# Altium PCB nrf24l01_cell(P40).PcbDoc (part 2 of 11)
Units mm, origin at the board's own origin, x right, y up, seen from the top; angles counter-clockwise.
Board outline 136.2 x 112.2 mm, 2 copper layers (TopLayer, BottomLayer); 520 components, 0 nets, 2804 pads, 1040 vias.
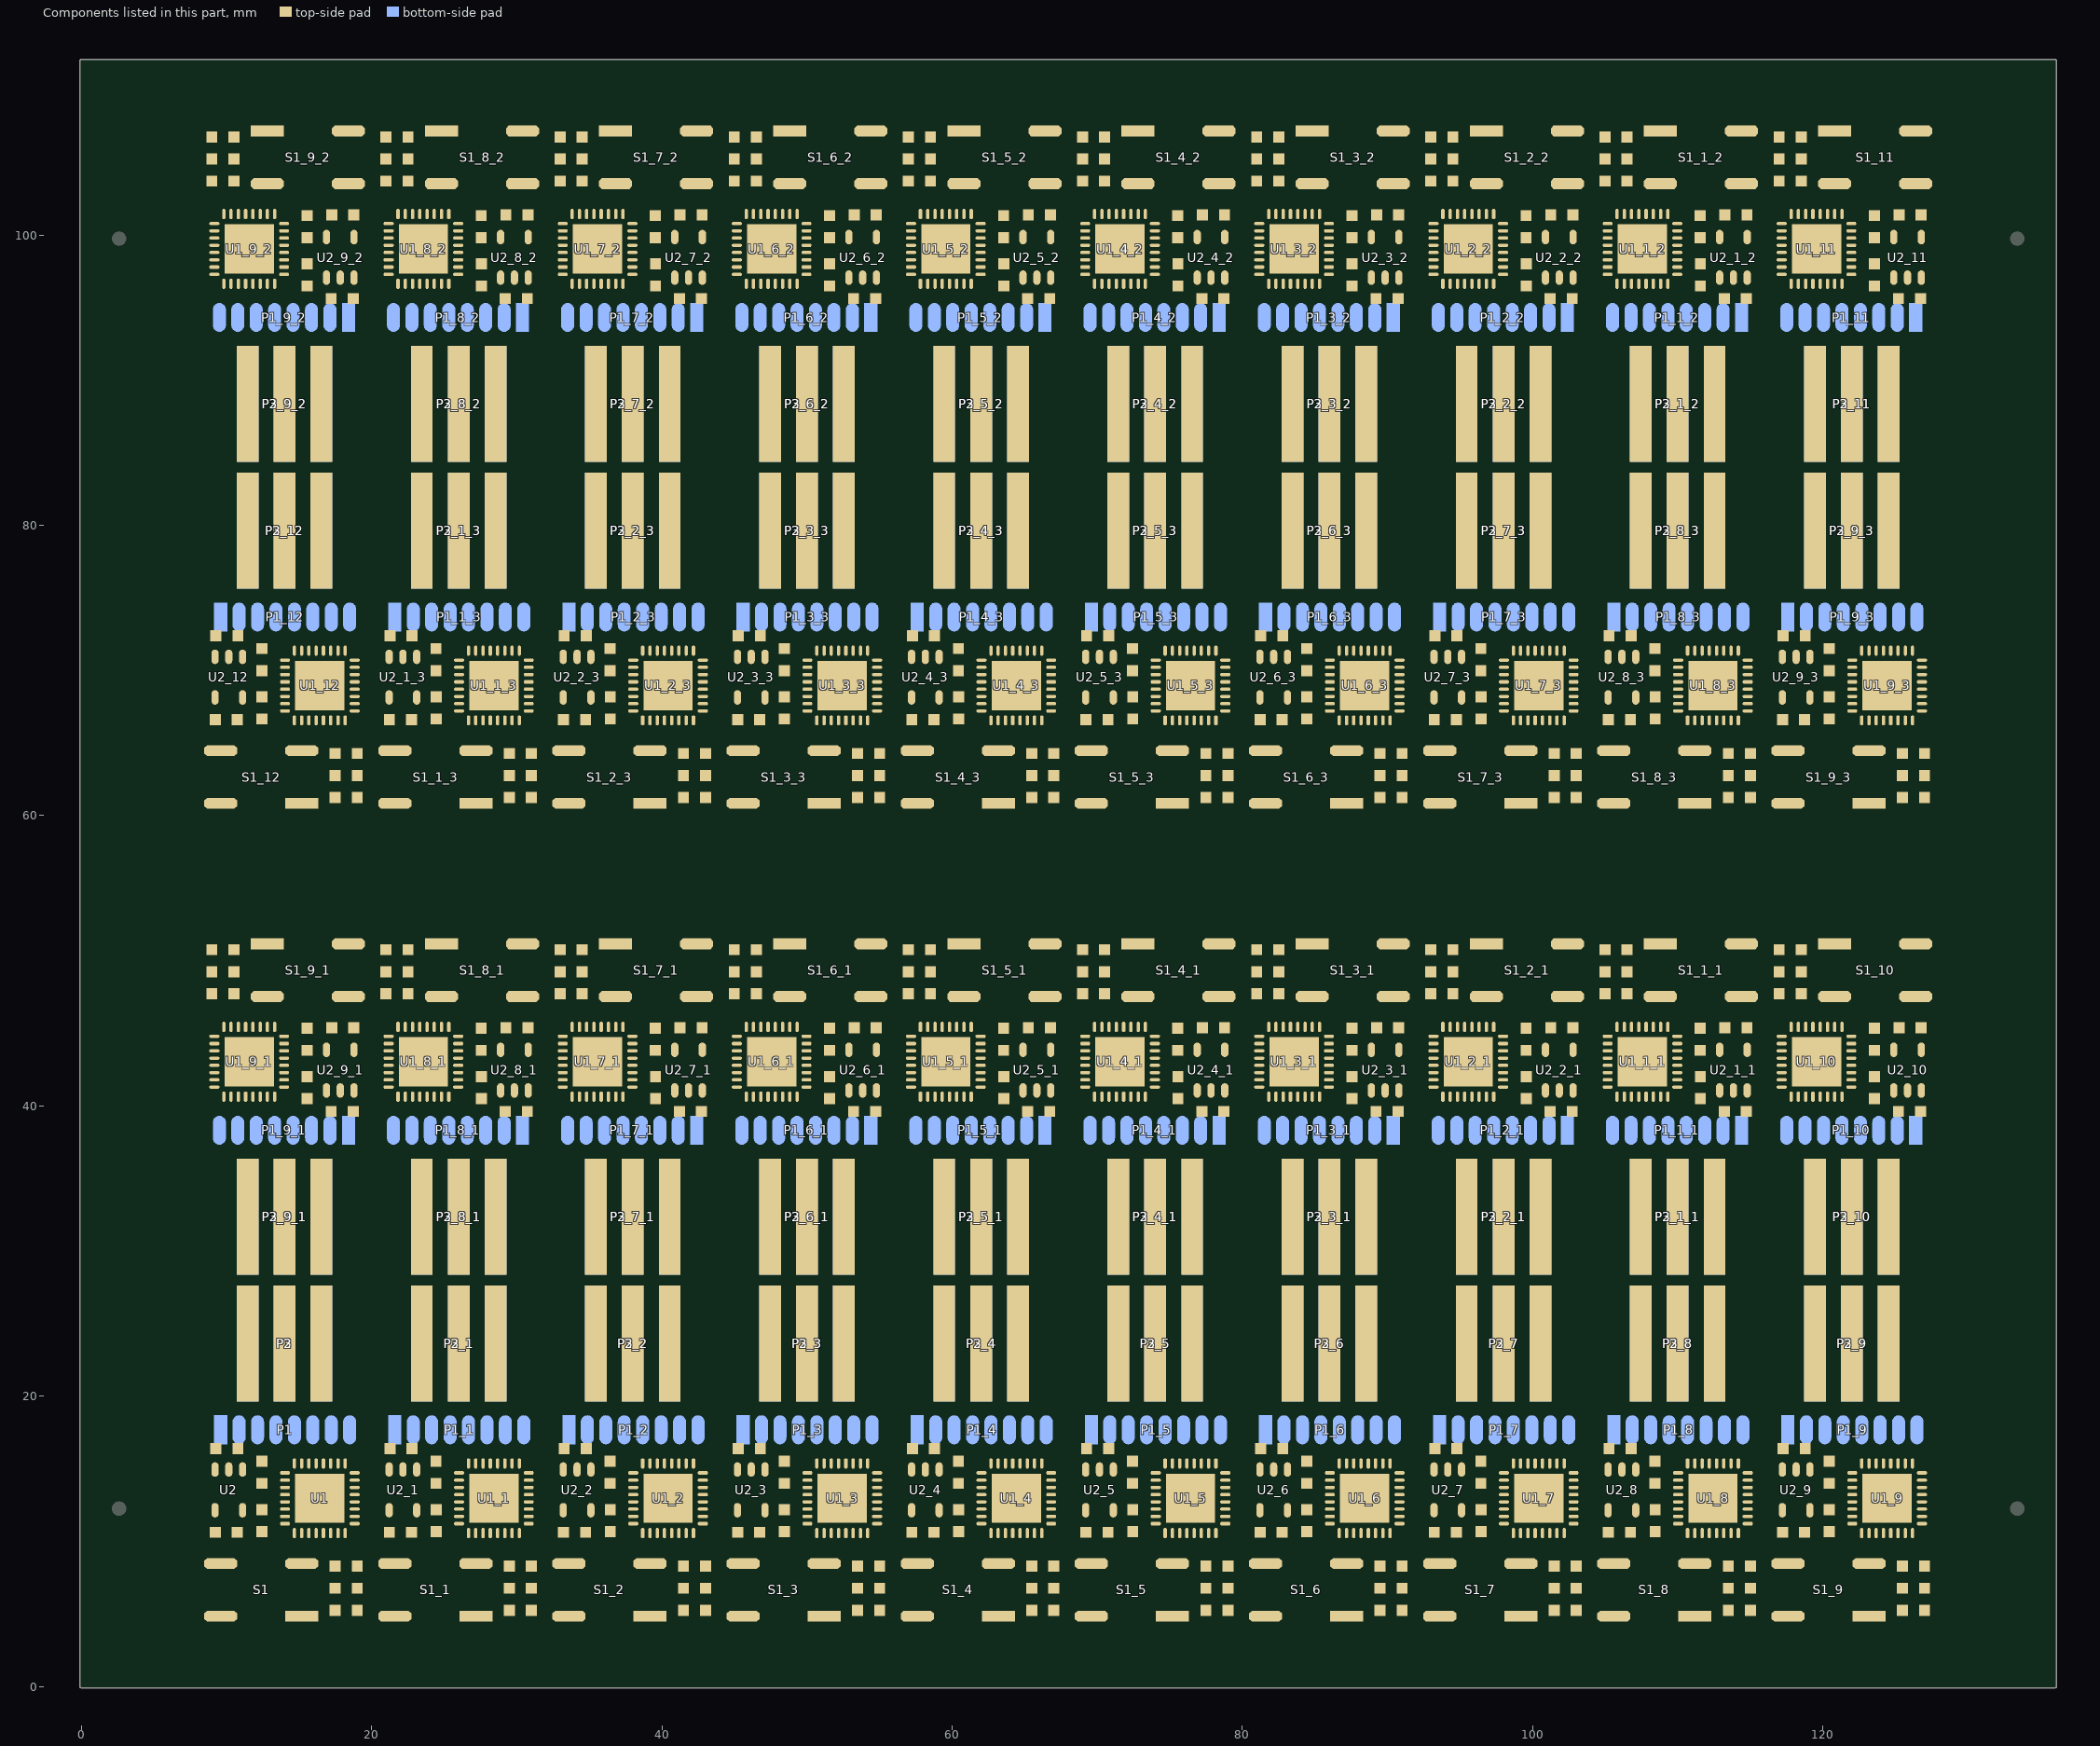
[diagram p2: the components of this part, seen from the top]

## Via types
v1: diameter 0.4, hole 0.2, TopLayer to BottomLayer, tented both sides, 1040 vias

## Nets (pads, with @x,y where several pads share a name; then routed paths per layer and width w, separated by ;. In a path a pad name is that pad's centre, name@x,y a point inside that pad or via, vN(x,y) a via of type N, cw(c..) or ccw(c..) an arc to the next point about the centre after c; other vN are vias at no path point)
pads on no net: C1.1 C1.2 C1_1.1 C1_1.2 C1_1_1.1 C1_1_1.2 C1_1_2.1 C1_1_2.2 C1_1_3.1 C1_1_3.2 C1_2.1 C1_2.2 C1_2_1.1 C1_2_1.2 C1_2_2.1 C1_2_2.2 C1_2_3.1 C1_2_3.2 C1_3.1 C1_3.2 C1_3_1.1 C1_3_1.2 C1_3_2.1 C1_3_2.2 C1_3_3.1 C1_3_3.2 C1_4.1 C1_4.2 C1_4_1.1 C1_4_1.2 C1_4_2.1 C1_4_2.2 C1_4_3.1 C1_4_3.2 C1_5.1 C1_5.2 C1_5_1.1 C1_5_1.2 C1_5_2.1 C1_5_2.2 C1_5_3.1 C1_5_3.2 C1_6.1 C1_6.2 C1_6_1.1 C1_6_1.2 C1_6_2.1 C1_6_2.2 C1_6_3.1 C1_6_3.2 C1_7.1 C1_7.2 C1_7_1.1 C1_7_1.2 C1_7_2.1 C1_7_2.2 C1_7_3.1 C1_7_3.2 C1_8.1 C1_8.2 C1_8_1.1 C1_8_1.2 C1_8_2.1 C1_8_2.2 C1_8_3.1 C1_8_3.2 C1_9.1 C1_9.2 C1_9_1.1 C1_9_1.2 C1_9_2.1 C1_9_2.2 C1_9_3.1 C1_9_3.2 C1_10.1 C1_10.2 C1_11.1 C1_11.2 C1_12.1 C1_12.2 C2.1 C2.2 C2_1.1 C2_1.2 C2_1_1.1 C2_1_1.2 C2_1_2.1 C2_1_2.2 C2_1_3.1 C2_1_3.2 C2_2.1 C2_2.2 C2_2_1.1 C2_2_1.2 C2_2_2.1 C2_2_2.2 C2_2_3.1 C2_2_3.2 C2_3.1 C2_3.2 C2_3_1.1 C2_3_1.2 C2_3_2.1 C2_3_2.2 C2_3_3.1 C2_3_3.2 C2_4.1 C2_4.2 C2_4_1.1 C2_4_1.2 C2_4_2.1 C2_4_2.2 C2_4_3.1 C2_4_3.2 C2_5.1 C2_5.2 C2_5_1.1 C2_5_1.2 C2_5_2.1 C2_5_2.2 C2_5_3.1 C2_5_3.2 C2_6.1 C2_6.2 C2_6_1.1 C2_6_1.2 C2_6_2.1 C2_6_2.2 C2_6_3.1 C2_6_3.2 C2_7.1 C2_7.2 C2_7_1.1 C2_7_1.2 C2_7_2.1 C2_7_2.2 C2_7_3.1 C2_7_3.2 C2_8.1 C2_8.2 C2_8_1.1 C2_8_1.2 C2_8_2.1 C2_8_2.2 C2_8_3.1 C2_8_3.2 C2_9.1 C2_9.2 C2_9_1.1 C2_9_1.2 C2_9_2.1 C2_9_2.2 C2_9_3.1 C2_9_3.2 C2_10.1 C2_10.2 C2_11.1 C2_11.2 C2_12.1 C2_12.2 C3.1 C3.2 C3_1.1 C3_1.2 C3_1_1.1 C3_1_1.2 C3_1_2.1 C3_1_2.2 C3_1_3.1 C3_1_3.2 C3_2.1 C3_2.2 C3_2_1.1 C3_2_1.2 C3_2_2.1 C3_2_2.2 C3_2_3.1 C3_2_3.2 C3_3.1 C3_3.2 C3_3_1.1 C3_3_1.2 C3_3_2.1 C3_3_2.2 C3_3_3.1 C3_3_3.2 C3_4.1 C3_4.2 C3_4_1.1 C3_4_1.2 C3_4_2.1 C3_4_2.2 C3_4_3.1 C3_4_3.2 C3_5.1 C3_5.2 C3_5_1.1 C3_5_1.2 C3_5_2.1 C3_5_2.2 C3_5_3.1 C3_5_3.2 C3_6.1 C3_6.2 C3_6_1.1 C3_6_1.2 C3_6_2.1 C3_6_2.2 C3_6_3.1 C3_6_3.2 C3_7.1 C3_7.2 C3_7_1.1 C3_7_1.2 C3_7_2.1 C3_7_2.2 C3_7_3.1 C3_7_3.2 C3_8.1 C3_8.2 C3_8_1.1 C3_8_1.2 C3_8_2.1 C3_8_2.2 C3_8_3.1 C3_8_3.2 C3_9.1 C3_9.2 C3_9_1.1 C3_9_1.2 C3_9_2.1 C3_9_2.2 C3_9_3.1 C3_9_3.2 C3_10.1 C3_10.2 C3_11.1 C3_11.2 C3_12.1 C3_12.2 D1.A D1.K D1_1.A D1_1.K D1_1_1.A D1_1_1.K D1_1_2.A D1_1_2.K D1_1_3.A D1_1_3.K D1_2.A D1_2.K D1_2_1.A D1_2_1.K D1_2_2.A D1_2_2.K D1_2_3.A D1_2_3.K D1_3.A D1_3.K D1_3_1.A D1_3_1.K D1_3_2.A D1_3_2.K D1_3_3.A D1_3_3.K D1_4.A D1_4.K D1_4_1.A D1_4_1.K D1_4_2.A D1_4_2.K D1_4_3.A D1_4_3.K D1_5.A D1_5.K D1_5_1.A D1_5_1.K D1_5_2.A D1_5_2.K D1_5_3.A D1_5_3.K D1_6.A D1_6.K D1_6_1.A D1_6_1.K D1_6_2.A D1_6_2.K D1_6_3.A D1_6_3.K D1_7.A D1_7.K D1_7_1.A D1_7_1.K D1_7_2.A D1_7_2.K D1_7_3.A D1_7_3.K D1_8.A D1_8.K D1_8_1.A D1_8_1.K D1_8_2.A D1_8_2.K D1_8_3.A D1_8_3.K D1_9.A D1_9.K D1_9_1.A D1_9_1.K D1_9_2.A D1_9_2.K D1_9_3.A D1_9_3.K D1_10.A D1_10.K D1_11.A D1_11.K D1_12.A D1_12.K P1.1 P1.2 P1.3 P1.4 P1.5 P1.6 P1.7 P1.8 P1_1.1 P1_1.2 P1_1.3 P1_1.4 P1_1.5 P1_1.6 P1_1.7 P1_1.8 P1_1_1.1 P1_1_1.2 P1_1_1.3 P1_1_1.4 P1_1_1.5 P1_1_1.6 P1_1_1.7 P1_1_1.8 P1_1_2.1 P1_1_2.2 P1_1_2.3 P1_1_2.4 P1_1_2.5 P1_1_2.6 P1_1_2.7 P1_1_2.8 P1_1_3.1 P1_1_3.2 P1_1_3.3 P1_1_3.4 P1_1_3.5 P1_1_3.6 P1_1_3.7 P1_1_3.8 P1_2.1 P1_2.2 P1_2.3 P1_2.4 P1_2.5 P1_2.6 P1_2.7 P1_2.8 P1_2_1.1 P1_2_1.2 P1_2_1.3 P1_2_1.4 P1_2_1.5 P1_2_1.6 P1_2_1.7 P1_2_1.8 P1_2_2.1 P1_2_2.2 P1_2_2.3 P1_2_2.4 P1_2_2.5 P1_2_2.6 P1_2_2.7 P1_2_2.8 P1_2_3.1 P1_2_3.2 P1_2_3.3 P1_2_3.4 P1_2_3.5 P1_2_3.6 P1_2_3.7 P1_2_3.8 P1_3.1 P1_3.2 P1_3.3 P1_3.4 P1_3.5 P1_3.6 P1_3.7 P1_3.8 P1_3_1.1 P1_3_1.2 P1_3_1.3 P1_3_1.4 P1_3_1.5 P1_3_1.6 P1_3_1.7 P1_3_1.8 P1_3_2.1 P1_3_2.2 P1_3_2.3 P1_3_2.4 P1_3_2.5 P1_3_2.6 P1_3_2.7 P1_3_2.8 P1_3_3.1 P1_3_3.2 P1_3_3.3 P1_3_3.4 P1_3_3.5 P1_3_3.6 P1_3_3.7 P1_3_3.8 P1_4.1 P1_4.2 P1_4.3 P1_4.4 P1_4.5 P1_4.6 P1_4.7 P1_4.8 P1_4_1.1 P1_4_1.2 P1_4_1.3 P1_4_1.4 P1_4_1.5 P1_4_1.6 P1_4_1.7 P1_4_1.8 P1_4_2.1 P1_4_2.2 P1_4_2.3 P1_4_2.4 P1_4_2.5 P1_4_2.6 P1_4_2.7 P1_4_2.8 P1_4_3.1 P1_4_3.2 P1_4_3.3 P1_4_3.4 P1_4_3.5 P1_4_3.6 P1_4_3.7 P1_4_3.8 P1_5.1 P1_5.2 P1_5.3 P1_5.4 P1_5.5 P1_5.6 P1_5.7 P1_5.8 P1_5_1.1 P1_5_1.2 P1_5_1.3 P1_5_1.4 P1_5_1.5 P1_5_1.6 P1_5_1.7 P1_5_1.8 P1_5_2.1 P1_5_2.2 P1_5_2.3 P1_5_2.4 P1_5_2.5 P1_5_2.6 P1_5_2.7 P1_5_2.8 P1_5_3.1 P1_5_3.2 P1_5_3.3 P1_5_3.4 P1_5_3.5 P1_5_3.6 P1_5_3.7 P1_5_3.8 P1_6.1 P1_6.2 P1_6.3 P1_6.4 P1_6.5 P1_6.6 P1_6.7 P1_6.8 P1_6_1.1 P1_6_1.2 P1_6_1.3 P1_6_1.4 P1_6_1.5 P1_6_1.6 P1_6_1.7 P1_6_1.8 P1_6_2.1 P1_6_2.2 P1_6_2.3 P1_6_2.4 P1_6_2.5 P1_6_2.6 P1_6_2.7 P1_6_2.8 P1_6_3.1 P1_6_3.2 P1_6_3.3 P1_6_3.4 P1_6_3.5 P1_6_3.6 P1_6_3.7 P1_6_3.8 P1_7.1 P1_7.2 P1_7.3 P1_7.4 P1_7.5 P1_7.6 P1_7.7 P1_7.8 P1_7_1.1 P1_7_1.2 P1_7_1.3 P1_7_1.4 P1_7_1.5 P1_7_1.6 P1_7_1.7 P1_7_1.8 P1_7_2.1 P1_7_2.2 P1_7_2.3 P1_7_2.4 P1_7_2.5 P1_7_2.6 P1_7_2.7 P1_7_2.8 P1_7_3.1 P1_7_3.2 P1_7_3.3 P1_7_3.4 P1_7_3.5 P1_7_3.6 P1_7_3.7 P1_7_3.8 P1_8.1 P1_8.2 P1_8.3 P1_8.4 P1_8.5 P1_8.6 P1_8.7 P1_8.8 P1_8_1.1 P1_8_1.2 P1_8_1.3 P1_8_1.4 P1_8_1.5 P1_8_1.6 P1_8_1.7 P1_8_1.8 P1_8_2.1 P1_8_2.2 P1_8_2.3 P1_8_2.4 P1_8_2.5 P1_8_2.6 P1_8_2.7 P1_8_2.8 P1_8_3.1 P1_8_3.2 P1_8_3.3 P1_8_3.4 P1_8_3.5 P1_8_3.6 P1_8_3.7 P1_8_3.8 P1_9.1 P1_9.2 P1_9.3 P1_9.4 P1_9.5 P1_9.6 P1_9.7 P1_9.8 P1_9_1.1 P1_9_1.2 P1_9_1.3 P1_9_1.4 P1_9_1.5 P1_9_1.6 P1_9_1.7 P1_9_1.8 P1_9_2.1 P1_9_2.2 P1_9_2.3 P1_9_2.4 P1_9_2.5 P1_9_2.6 P1_9_2.7 P1_9_2.8 P1_9_3.1 P1_9_3.2 P1_9_3.3 P1_9_3.4 P1_9_3.5 P1_9_3.6 P1_9_3.7 P1_9_3.8 P1_10.1 P1_10.2 P1_10.3 P1_10.4 P1_10.5 P1_10.6 P1_10.7 P1_10.8 P1_11.1 P1_11.2 P1_11.3 P1_11.4 P1_11.5 P1_11.6 P1_11.7 P1_11.8 P1_12.1 P1_12.2 P1_12.3 P1_12.4 P1_12.5 P1_12.6 P1_12.7 P1_12.8 P2.1 P2.2 P2.3 P2_1.1 P2_1.2 P2_1.3 P2_1_1.1 P2_1_1.2 P2_1_1.3 P2_1_2.1 P2_1_2.2 P2_1_2.3 P2_1_3.1 P2_1_3.2 P2_1_3.3 P2_2.1 P2_2.2 P2_2.3 P2_2_1.1 P2_2_1.2 P2_2_1.3 P2_2_2.1 P2_2_2.2 P2_2_2.3 P2_2_3.1 P2_2_3.2 P2_2_3.3 P2_3.1 P2_3.2 P2_3.3 P2_3_1.1 P2_3_1.2 P2_3_1.3 P2_3_2.1 P2_3_2.2 P2_3_2.3 P2_3_3.1 P2_3_3.2 P2_3_3.3 P2_4.1 P2_4.2 P2_4.3 P2_4_1.1 P2_4_1.2 P2_4_1.3 P2_4_2.1 P2_4_2.2 P2_4_2.3 P2_4_3.1 P2_4_3.2 P2_4_3.3 P2_5.1 P2_5.2 P2_5.3 P2_5_1.1 P2_5_1.2 P2_5_1.3 P2_5_2.1 P2_5_2.2 P2_5_2.3 P2_5_3.1 P2_5_3.2 P2_5_3.3 P2_6.1 P2_6.2 P2_6.3 P2_6_1.1 P2_6_1.2 P2_6_1.3 P2_6_2.1 P2_6_2.2 P2_6_2.3 P2_6_3.1 P2_6_3.2 P2_6_3.3 P2_7.1 P2_7.2 P2_7.3 P2_7_1.1 P2_7_1.2 P2_7_1.3 P2_7_2.1 P2_7_2.2 P2_7_2.3 P2_7_3.1 P2_7_3.2 P2_7_3.3 P2_8.1 P2_8.2 P2_8.3 P2_8_1.1 P2_8_1.2 P2_8_1.3 P2_8_2.1 P2_8_2.2 P2_8_2.3 P2_8_3.1 P2_8_3.2 P2_8_3.3 P2_9.1 P2_9.2 P2_9.3 P2_9_1.1 P2_9_1.2 P2_9_1.3 P2_9_2.1 P2_9_2.2 P2_9_2.3 P2_9_3.1 P2_9_3.2 P2_9_3.3 P2_10.1 P2_10.2 P2_10.3 P2_11.1 P2_11.2 P2_11.3 P2_12.1 P2_12.2 P2_12.3 P3.1 P3.2 P3.3 P3_1.1 P3_1.2 P3_1.3 P3_1_1.1 P3_1_1.2 P3_1_1.3 P3_1_2.1 P3_1_2.2 P3_1_2.3 P3_1_3.1 P3_1_3.2 P3_1_3.3 P3_2.1 P3_2.2 P3_2.3 P3_2_1.1 P3_2_1.2 P3_2_1.3 P3_2_2.1 P3_2_2.2 P3_2_2.3 P3_2_3.1 P3_2_3.2 P3_2_3.3 P3_3.1 P3_3.2 P3_3.3 P3_3_1.1 P3_3_1.2 P3_3_1.3 P3_3_2.1 P3_3_2.2 P3_3_2.3 P3_3_3.1 P3_3_3.2 P3_3_3.3 P3_4.1 P3_4.2 P3_4.3 P3_4_1.1 P3_4_1.2 P3_4_1.3 P3_4_2.1 P3_4_2.2 P3_4_2.3 P3_4_3.1 P3_4_3.2 P3_4_3.3 P3_5.1 P3_5.2 P3_5.3 P3_5_1.1 P3_5_1.2 P3_5_1.3 P3_5_2.1 P3_5_2.2 P3_5_2.3 P3_5_3.1 P3_5_3.2 P3_5_3.3 P3_6.1 P3_6.2 P3_6.3 P3_6_1.1 P3_6_1.2 P3_6_1.3 P3_6_2.1 P3_6_2.2 P3_6_2.3 P3_6_3.1 P3_6_3.2 P3_6_3.3 P3_7.1 P3_7.2 P3_7.3 P3_7_1.1 P3_7_1.2 P3_7_1.3 P3_7_2.1 P3_7_2.2 P3_7_2.3 P3_7_3.1 P3_7_3.2 P3_7_3.3 P3_8.1 P3_8.2 P3_8.3 P3_8_1.1 P3_8_1.2 P3_8_1.3 P3_8_2.1 P3_8_2.2 P3_8_2.3 P3_8_3.1 P3_8_3.2 P3_8_3.3 P3_9.1 P3_9.2 P3_9.3 P3_9_1.1 P3_9_1.2 P3_9_1.3 P3_9_2.1 P3_9_2.2 P3_9_2.3 P3_9_3.1 P3_9_3.2 P3_9_3.3 P3_10.1 P3_10.2 P3_10.3 P3_11.1 P3_11.2 P3_11.3 P3_12.1 P3_12.2 P3_12.3 R1.1 R1.2 R1_1.1 R1_1.2 R1_1_1.1 R1_1_1.2 R1_1_2.1 R1_1_2.2 R1_1_3.1 R1_1_3.2 R1_2.1 R1_2.2 R1_2_1.1 R1_2_1.2 R1_2_2.1 R1_2_2.2 R1_2_3.1 R1_2_3.2 R1_3.1 R1_3.2 R1_3_1.1 R1_3_1.2 R1_3_2.1 R1_3_2.2 R1_3_3.1 R1_3_3.2 R1_4.1 R1_4.2 R1_4_1.1 R1_4_1.2 R1_4_2.1 R1_4_2.2 R1_4_3.1 R1_4_3.2 R1_5.1 R1_5.2 R1_5_1.1 R1_5_1.2 R1_5_2.1 R1_5_2.2 R1_5_3.1 R1_5_3.2 R1_6.1 R1_6.2 R1_6_1.1 R1_6_1.2 R1_6_2.1 R1_6_2.2 R1_6_3.1 R1_6_3.2 R1_7.1 R1_7.2 R1_7_1.1 R1_7_1.2 R1_7_2.1 R1_7_2.2 R1_7_3.1 R1_7_3.2 R1_8.1 R1_8.2 R1_8_1.1 R1_8_1.2 R1_8_2.1 R1_8_2.2 R1_8_3.1 R1_8_3.2 R1_9.1 R1_9.2 R1_9_1.1 R1_9_1.2 R1_9_2.1 R1_9_2.2 R1_9_3.1 R1_9_3.2 R1_10.1 R1_10.2 R1_11.1 R1_11.2 R1_12.1 R1_12.2 R2.1 R2.2 R2_1.1 R2_1.2 R2_1_1.1 R2_1_1.2 R2_1_2.1 R2_1_2.2 R2_1_3.1 R2_1_3.2 R2_2.1 R2_2.2 R2_2_1.1 R2_2_1.2 R2_2_2.1 R2_2_2.2 R2_2_3.1 R2_2_3.2 R2_3.1 R2_3.2 R2_3_1.1 R2_3_1.2 R2_3_2.1 R2_3_2.2 R2_3_3.1 R2_3_3.2 R2_4.1 R2_4.2 R2_4_1.1 R2_4_1.2 R2_4_2.1 R2_4_2.2 R2_4_3.1 R2_4_3.2 R2_5.1 R2_5.2 R2_5_1.1 R2_5_1.2 R2_5_2.1 R2_5_2.2 R2_5_3.1 R2_5_3.2 R2_6.1 R2_6.2 R2_6_1.1 R2_6_1.2 R2_6_2.1 R2_6_2.2 R2_6_3.1 R2_6_3.2 R2_7.1 R2_7.2 R2_7_1.1 R2_7_1.2 R2_7_2.1 R2_7_2.2 R2_7_3.1 R2_7_3.2 R2_8.1 R2_8.2 R2_8_1.1 R2_8_1.2 R2_8_2.1 R2_8_2.2 R2_8_3.1 R2_8_3.2 R2_9.1 R2_9.2 R2_9_1.1 R2_9_1.2 R2_9_2.1 R2_9_2.2 R2_9_3.1 R2_9_3.2 R2_10.1 R2_10.2 R2_11.1 R2_11.2 R2_12.1 R2_12.2 R3.1 R3.2 R3_1.1 R3_1.2 R3_1_1.1 R3_1_1.2 R3_1_2.1 R3_1_2.2 R3_1_3.1 R3_1_3.2 R3_2.1 R3_2.2 R3_2_1.1 R3_2_1.2 R3_2_2.1 R3_2_2.2 R3_2_3.1 R3_2_3.2 R3_3.1 R3_3.2 R3_3_1.1 R3_3_1.2 R3_3_2.1 R3_3_2.2 R3_3_3.1 R3_3_3.2 R3_4.1 R3_4.2 R3_4_1.1 R3_4_1.2 R3_4_2.1 R3_4_2.2 R3_4_3.1 R3_4_3.2 R3_5.1 R3_5.2 R3_5_1.1 R3_5_1.2 R3_5_2.1 R3_5_2.2 R3_5_3.1 R3_5_3.2 R3_6.1 R3_6.2 R3_6_1.1 R3_6_1.2 R3_6_2.1 R3_6_2.2 R3_6_3.1 R3_6_3.2 R3_7.1 R3_7.2 R3_7_1.1 R3_7_1.2 R3_7_2.1 R3_7_2.2 R3_7_3.1 R3_7_3.2 R3_8.1 R3_8.2 R3_8_1.1 R3_8_1.2 R3_8_2.1 R3_8_2.2 R3_8_3.1 R3_8_3.2 R3_9.1 R3_9.2 R3_9_1.1 R3_9_1.2 R3_9_2.1 R3_9_2.2 R3_9_3.1 R3_9_3.2 R3_10.1 R3_10.2 R3_11.1 R3_11.2 R3_12.1 R3_12.2 S1.1 S1.2 S1.3 S1.4 S1_1.1 S1_1.2 S1_1.3 S1_1.4 S1_1_1.1 S1_1_1.2 S1_1_1.3 S1_1_1.4 S1_1_2.1 S1_1_2.2 S1_1_2.3 S1_1_2.4 S1_1_3.1 S1_1_3.2 S1_1_3.3 S1_1_3.4 S1_2.1 S1_2.2 S1_2.3 S1_2.4 S1_2_1.1 S1_2_1.2 S1_2_1.3 S1_2_1.4 S1_2_2.1 S1_2_2.2 S1_2_2.3 S1_2_2.4 S1_2_3.1 S1_2_3.2 S1_2_3.3 S1_2_3.4 S1_3.1 S1_3.2 S1_3.3 S1_3.4 S1_3_1.1 S1_3_1.2 S1_3_1.3 S1_3_1.4 S1_3_2.1 S1_3_2.2 S1_3_2.3 S1_3_2.4 S1_3_3.1 S1_3_3.2 S1_3_3.3 S1_3_3.4 S1_4.1 S1_4.2 S1_4.3 S1_4.4 S1_4_1.1 S1_4_1.2 S1_4_1.3 S1_4_1.4 S1_4_2.1 S1_4_2.2 S1_4_2.3 S1_4_2.4 S1_4_3.1 S1_4_3.2 S1_4_3.3 S1_4_3.4 S1_5.1 S1_5.2 S1_5.3 S1_5.4 S1_5_1.1 S1_5_1.2 S1_5_1.3 S1_5_1.4 S1_5_2.1 S1_5_2.2 S1_5_2.3 S1_5_2.4 S1_5_3.1 S1_5_3.2 S1_5_3.3 S1_5_3.4 S1_6.1 S1_6.2 S1_6.3 S1_6.4 S1_6_1.1 S1_6_1.2 S1_6_1.3 S1_6_1.4 S1_6_2.1 S1_6_2.2 S1_6_2.3 S1_6_2.4 S1_6_3.1 S1_6_3.2 S1_6_3.3 S1_6_3.4 S1_7.1 S1_7.2 S1_7.3 S1_7.4 S1_7_1.1 S1_7_1.2 S1_7_1.3 S1_7_1.4 S1_7_2.1 S1_7_2.2 S1_7_2.3 S1_7_2.4 S1_7_3.1 S1_7_3.2 S1_7_3.3 S1_7_3.4 S1_8.1 S1_8.2 S1_8.3 S1_8.4 S1_8_1.1 S1_8_1.2 S1_8_1.3 S1_8_1.4 S1_8_2.1 S1_8_2.2 S1_8_2.3 S1_8_2.4 S1_8_3.1 S1_8_3.2 S1_8_3.3 S1_8_3.4 S1_9.1 S1_9.2 S1_9.3 S1_9.4 S1_9_1.1 S1_9_1.2 S1_9_1.3 S1_9_1.4 S1_9_2.1 S1_9_2.2 S1_9_2.3 S1_9_2.4 S1_9_3.1 S1_9_3.2 S1_9_3.3 S1_9_3.4 S1_10.1 S1_10.2 S1_10.3 S1_10.4 S1_11.1 S1_11.2 S1_11.3 S1_11.4 S1_12.1 S1_12.2 S1_12.3 S1_12.4 U1.1 U1.2 U1.3 U1.4 U1.5 U1.6 U1.7 U1.8 U1.9 U1.10 U1.11 U1.12 U1.13 U1.14 U1.15 U1.16 U1.17 U1.18 U1.19 U1.20 U1.21 U1.22 U1.23 U1.24 U1.25 U1.26 U1.27 U1.28 U1.29 U1.30 U1.31 U1.32 U1.33 U1_1.1 U1_1.2 U1_1.3 U1_1.4 U1_1.5 U1_1.6 U1_1.7 U1_1.8 U1_1.9 U1_1.10 U1_1.11 U1_1.12 U1_1.13 U1_1.14 U1_1.15 U1_1.16 U1_1.17 U1_1.18 U1_1.19 U1_1.20 U1_1.21 U1_1.22 U1_1.23 U1_1.24 U1_1.25 U1_1.26 U1_1.27 U1_1.28 U1_1.29 U1_1.30 U1_1.31 U1_1.32 U1_1.33 U1_1_1.1 U1_1_1.2 U1_1_1.3 U1_1_1.4 U1_1_1.5 U1_1_1.6 U1_1_1.7 U1_1_1.8 U1_1_1.9 U1_1_1.10 U1_1_1.11 U1_1_1.12 U1_1_1.13 U1_1_1.14 U1_1_1.15 U1_1_1.16 U1_1_1.17 U1_1_1.18 U1_1_1.19 U1_1_1.20 U1_1_1.21 U1_1_1.22 U1_1_1.23 U1_1_1.24 U1_1_1.25 U1_1_1.26 U1_1_1.27 U1_1_1.28 U1_1_1.29 U1_1_1.30 U1_1_1.31 U1_1_1.32 U1_1_1.33 U1_1_2.1 U1_1_2.2 U1_1_2.3 U1_1_2.4 U1_1_2.5 U1_1_2.6 U1_1_2.7 U1_1_2.8 U1_1_2.9 U1_1_2.10 U1_1_2.11 U1_1_2.12 U1_1_2.13 U1_1_2.14 U1_1_2.15 U1_1_2.16 U1_1_2.17 U1_1_2.18 U1_1_2.19 U1_1_2.20 U1_1_2.21 U1_1_2.22 U1_1_2.23 U1_1_2.24 U1_1_2.25 U1_1_2.26 U1_1_2.27 U1_1_2.28 U1_1_2.29 U1_1_2.30 U1_1_2.31 U1_1_2.32 U1_1_2.33 U1_1_3.1 U1_1_3.2 U1_1_3.3 U1_1_3.4 U1_1_3.5 U1_1_3.6 U1_1_3.7 U1_1_3.8 U1_1_3.9 U1_1_3.10 U1_1_3.11 U1_1_3.12 U1_1_3.13 U1_1_3.14 U1_1_3.15 U1_1_3.16 U1_1_3.17 U1_1_3.18 U1_1_3.19 U1_1_3.20 U1_1_3.21 U1_1_3.22 U1_1_3.23 U1_1_3.24 U1_1_3.25 U1_1_3.26 U1_1_3.27 U1_1_3.28 U1_1_3.29 U1_1_3.30 U1_1_3.31 U1_1_3.32 U1_1_3.33 U1_2.1 U1_2.2 U1_2.3 U1_2.4 U1_2.5 U1_2.6 U1_2.7 U1_2.8 U1_2.9 U1_2.10 U1_2.11 U1_2.12 U1_2.13 U1_2.14 U1_2.15 U1_2.16 U1_2.17 U1_2.18 U1_2.19 U1_2.20 U1_2.21 U1_2.22 U1_2.23 U1_2.24 U1_2.25 U1_2.26 U1_2.27 U1_2.28 U1_2.29 U1_2.30 U1_2.31 U1_2.32 U1_2.33 U1_2_1.1 U1_2_1.2 U1_2_1.3 U1_2_1.4 U1_2_1.5 U1_2_1.6 U1_2_1.7 U1_2_1.8 U1_2_1.9 U1_2_1.10 U1_2_1.11 U1_2_1.12 U1_2_1.13 U1_2_1.14 U1_2_1.15 U1_2_1.16 U1_2_1.17 U1_2_1.18 U1_2_1.19 U1_2_1.20 U1_2_1.21 U1_2_1.22 U1_2_1.23 U1_2_1.24 U1_2_1.25 U1_2_1.26 U1_2_1.27 U1_2_1.28 U1_2_1.29 U1_2_1.30 U1_2_1.31 U1_2_1.32 U1_2_1.33 U1_2_2.1 U1_2_2.2 U1_2_2.3 U1_2_2.4 U1_2_2.5 U1_2_2.6 U1_2_2.7 U1_2_2.8 U1_2_2.9 U1_2_2.10 U1_2_2.11 U1_2_2.12 U1_2_2.13 U1_2_2.14 U1_2_2.15 U1_2_2.16 U1_2_2.17 U1_2_2.18 U1_2_2.19 U1_2_2.20 U1_2_2.21 U1_2_2.22 U1_2_2.23 U1_2_2.24 U1_2_2.25 U1_2_2.26 U1_2_2.27 U1_2_2.28 U1_2_2.29 U1_2_2.30 U1_2_2.31 U1_2_2.32 U1_2_2.33 U1_2_3.1 U1_2_3.2 U1_2_3.3 U1_2_3.4 U1_2_3.5 U1_2_3.6 U1_2_3.7 U1_2_3.8 U1_2_3.9 U1_2_3.10 U1_2_3.11 U1_2_3.12 U1_2_3.13 U1_2_3.14 U1_2_3.15 U1_2_3.16 U1_2_3.17 U1_2_3.18 U1_2_3.19 U1_2_3.20 U1_2_3.21 U1_2_3.22 U1_2_3.23 U1_2_3.24 U1_2_3.25 U1_2_3.26 U1_2_3.27 U1_2_3.28 U1_2_3.29 U1_2_3.30 U1_2_3.31 U1_2_3.32 U1_2_3.33 U1_3.1 U1_3.2 U1_3.3 U1_3.4 U1_3.5 U1_3.6 U1_3.7 U1_3.8 U1_3.9 U1_3.10 U1_3.11 U1_3.12 U1_3.13 U1_3.14 U1_3.15 U1_3.16 U1_3.17 U1_3.18 U1_3.19 U1_3.20 U1_3.21 U1_3.22 U1_3.23 U1_3.24 U1_3.25 U1_3.26 U1_3.27 U1_3.28 U1_3.29 U1_3.30 U1_3.31 U1_3.32 U1_3.33 U1_3_1.1 U1_3_1.2 U1_3_1.3 U1_3_1.4 U1_3_1.5 U1_3_1.6 U1_3_1.7 U1_3_1.8 U1_3_1.9 U1_3_1.10 U1_3_1.11 U1_3_1.12 U1_3_1.13 U1_3_1.14 U1_3_1.15 U1_3_1.16 U1_3_1.17 U1_3_1.18 U1_3_1.19 U1_3_1.20 U1_3_1.21 U1_3_1.22 U1_3_1.23 U1_3_1.24 U1_3_1.25 U1_3_1.26 U1_3_1.27 U1_3_1.28 U1_3_1.29 U1_3_1.30 U1_3_1.31 U1_3_1.32 U1_3_1.33 U1_3_2.1 U1_3_2.2 U1_3_2.3 U1_3_2.4 U1_3_2.5 U1_3_2.6 U1_3_2.7 U1_3_2.8 U1_3_2.9 U1_3_2.10 U1_3_2.11 U1_3_2.12 U1_3_2.13 U1_3_2.14 U1_3_2.15 U1_3_2.16 U1_3_2.17 U1_3_2.18 U1_3_2.19 U1_3_2.20 U1_3_2.21 U1_3_2.22 U1_3_2.23 U1_3_2.24 U1_3_2.25 U1_3_2.26 U1_3_2.27 U1_3_2.28 U1_3_2.29 U1_3_2.30 U1_3_2.31 U1_3_2.32 U1_3_2.33 U1_3_3.1 U1_3_3.2 U1_3_3.3 U1_3_3.4 U1_3_3.5 U1_3_3.6 U1_3_3.7 U1_3_3.8 U1_3_3.9 U1_3_3.10 U1_3_3.11 U1_3_3.12 U1_3_3.13 U1_3_3.14 U1_3_3.15 U1_3_3.16 U1_3_3.17 U1_3_3.18 U1_3_3.19 U1_3_3.20 U1_3_3.21 U1_3_3.22 U1_3_3.23 U1_3_3.24 U1_3_3.25 U1_3_3.26 U1_3_3.27 U1_3_3.28 U1_3_3.29 U1_3_3.30 U1_3_3.31 U1_3_3.32 U1_3_3.33 U1_4.1 U1_4.2 U1_4.3 U1_4.4 U1_4.5 U1_4.6 U1_4.7 U1_4.8 U1_4.9 U1_4.10 U1_4.11 U1_4.12 U1_4.13 U1_4.14 U1_4.15 U1_4.16 U1_4.17 U1_4.18 U1_4.19 U1_4.20 U1_4.21 U1_4.22 U1_4.23 U1_4.24 U1_4.25 U1_4.26 U1_4.27 U1_4.28 U1_4.29 U1_4.30 U1_4.31 U1_4.32 U1_4.33 U1_4_1.1 U1_4_1.2 U1_4_1.3 U1_4_1.4 U1_4_1.5 U1_4_1.6 U1_4_1.7 U1_4_1.8 U1_4_1.9 U1_4_1.10 U1_4_1.11 U1_4_1.12 U1_4_1.13 U1_4_1.14 U1_4_1.15 U1_4_1.16 U1_4_1.17 U1_4_1.18 U1_4_1.19 U1_4_1.20 U1_4_1.21 U1_4_1.22 U1_4_1.23 U1_4_1.24 U1_4_1.25 U1_4_1.26 U1_4_1.27 U1_4_1.28 U1_4_1.29 U1_4_1.30 U1_4_1.31 U1_4_1.32 U1_4_1.33 U1_4_2.1 U1_4_2.2 U1_4_2.3 U1_4_2.4 U1_4_2.5 U1_4_2.6 U1_4_2.7 U1_4_2.8 U1_4_2.9 U1_4_2.10 U1_4_2.11 U1_4_2.12 U1_4_2.13 U1_4_2.14 U1_4_2.15 U1_4_2.16 U1_4_2.17 U1_4_2.18 U1_4_2.19 U1_4_2.20 U1_4_2.21 U1_4_2.22 U1_4_2.23 U1_4_2.24 U1_4_2.25 U1_4_2.26 U1_4_2.27 U1_4_2.28 U1_4_2.29 U1_4_2.30 U1_4_2.31 U1_4_2.32 U1_4_2.33 U1_4_3.1 U1_4_3.2 U1_4_3.3 U1_4_3.4 U1_4_3.5 U1_4_3.6 U1_4_3.7 U1_4_3.8 U1_4_3.9 U1_4_3.10 U1_4_3.11 U1_4_3.12 U1_4_3.13 U1_4_3.14 U1_4_3.15 U1_4_3.16 U1_4_3.17 U1_4_3.18 U1_4_3.19 U1_4_3.20 U1_4_3.21 U1_4_3.22 U1_4_3.23 U1_4_3.24 U1_4_3.25 U1_4_3.26 U1_4_3.27 U1_4_3.28 U1_4_3.29 U1_4_3.30 U1_4_3.31 U1_4_3.32 U1_4_3.33 U1_5.1 U1_5.2 U1_5.3 U1_5.4 U1_5.5 U1_5.6 U1_5.7 U1_5.8 U1_5.9 U1_5.10 U1_5.11 U1_5.12 U1_5.13 U1_5.14 U1_5.15 U1_5.16 U1_5.17 U1_5.18 U1_5.19 U1_5.20 U1_5.21 U1_5.22 U1_5.23 U1_5.24 U1_5.25 U1_5.26 U1_5.27 U1_5.28 U1_5.29 U1_5.30 U1_5.31 U1_5.32 U1_5.33 U1_5_1.1 U1_5_1.2 U1_5_1.3 U1_5_1.4 U1_5_1.5 U1_5_1.6 U1_5_1.7 U1_5_1.8 U1_5_1.9 U1_5_1.10 U1_5_1.11 U1_5_1.12 U1_5_1.13 U1_5_1.14 U1_5_1.15 U1_5_1.16 U1_5_1.17 U1_5_1.18 U1_5_1.19 U1_5_1.20 U1_5_1.21 U1_5_1.22 U1_5_1.23 U1_5_1.24 U1_5_1.25 U1_5_1.26 U1_5_1.27 U1_5_1.28 U1_5_1.29 U1_5_1.30 U1_5_1.31 U1_5_1.32 U1_5_1.33 U1_5_2.1 U1_5_2.2 U1_5_2.3 U1_5_2.4 U1_5_2.5 U1_5_2.6 U1_5_2.7 U1_5_2.8 U1_5_2.9 U1_5_2.10 U1_5_2.11 U1_5_2.12 U1_5_2.13 U1_5_2.14 U1_5_2.15 U1_5_2.16 U1_5_2.17 U1_5_2.18 U1_5_2.19 U1_5_2.20 U1_5_2.21 U1_5_2.22 U1_5_2.23 U1_5_2.24 U1_5_2.25 U1_5_2.26 U1_5_2.27 U1_5_2.28 U1_5_2.29 U1_5_2.30 U1_5_2.31 U1_5_2.32 U1_5_2.33 U1_5_3.1 U1_5_3.2 U1_5_3.3 U1_5_3.4 U1_5_3.5 U1_5_3.6 U1_5_3.7 U1_5_3.8 U1_5_3.9 U1_5_3.10 U1_5_3.11 U1_5_3.12 U1_5_3.13 U1_5_3.14 U1_5_3.15 U1_5_3.16 U1_5_3.17 U1_5_3.18 U1_5_3.19 U1_5_3.20 U1_5_3.21 U1_5_3.22 U1_5_3.23 U1_5_3.24 U1_5_3.25 U1_5_3.26 U1_5_3.27 U1_5_3.28 U1_5_3.29 U1_5_3.30 U1_5_3.31 U1_5_3.32 U1_5_3.33 U1_6.1 U1_6.2 U1_6.3 U1_6.4 U1_6.5 U1_6.6 U1_6.7 U1_6.8 U1_6.9 U1_6.10 U1_6.11 U1_6.12 U1_6.13 U1_6.14 U1_6.15 U1_6.16 U1_6.17 U1_6.18 U1_6.19 U1_6.20 U1_6.21 U1_6.22 U1_6.23 U1_6.24 U1_6.25 U1_6.26 U1_6.27 U1_6.28 U1_6.29 U1_6.30 U1_6.31 U1_6.32 U1_6.33 U1_6_1.1 U1_6_1.2 U1_6_1.3 U1_6_1.4 U1_6_1.5 U1_6_1.6 U1_6_1.7 U1_6_1.8 U1_6_1.9 U1_6_1.10 U1_6_1.11 U1_6_1.12 U1_6_1.13 U1_6_1.14 U1_6_1.15 U1_6_1.16 U1_6_1.17 U1_6_1.18 U1_6_1.19 U1_6_1.20 U1_6_1.21 U1_6_1.22 U1_6_1.23 U1_6_1.24 U1_6_1.25 U1_6_1.26 U1_6_1.27 U1_6_1.28 U1_6_1.29 U1_6_1.30 U1_6_1.31 U1_6_1.32 U1_6_1.33 U1_6_2.1 U1_6_2.2 U1_6_2.3 U1_6_2.4 U1_6_2.5 U1_6_2.6 U1_6_2.7 U1_6_2.8 U1_6_2.9 U1_6_2.10 U1_6_2.11 U1_6_2.12 U1_6_2.13 U1_6_2.14 U1_6_2.15 U1_6_2.16 U1_6_2.17 U1_6_2.18 U1_6_2.19 U1_6_2.20 U1_6_2.21 U1_6_2.22 U1_6_2.23 U1_6_2.24 U1_6_2.25 U1_6_2.26 U1_6_2.27 U1_6_2.28 U1_6_2.29 U1_6_2.30 U1_6_2.31 U1_6_2.32 U1_6_2.33 U1_6_3.1 U1_6_3.2 U1_6_3.3 U1_6_3.4 U1_6_3.5 U1_6_3.6 U1_6_3.7 U1_6_3.8 U1_6_3.9 U1_6_3.10 U1_6_3.11 U1_6_3.12 U1_6_3.13 U1_6_3.14 U1_6_3.15 U1_6_3.16 U1_6_3.17 U1_6_3.18 U1_6_3.19 U1_6_3.20 U1_6_3.21 U1_6_3.22 U1_6_3.23 U1_6_3.24 U1_6_3.25 U1_6_3.26 U1_6_3.27 U1_6_3.28 U1_6_3.29 U1_6_3.30 U1_6_3.31 U1_6_3.32 U1_6_3.33 U1_7.1 U1_7.2 U1_7.3 U1_7.4 U1_7.5 U1_7.6 U1_7.7 U1_7.8 U1_7.9 U1_7.10 U1_7.11 U1_7.12 U1_7.13 U1_7.14 U1_7.15 U1_7.16 U1_7.17 U1_7.18 U1_7.19 U1_7.20 U1_7.21 U1_7.22 U1_7.23 U1_7.24 U1_7.25 U1_7.26 U1_7.27 U1_7.28 U1_7.29 U1_7.30 U1_7.31 U1_7.32 U1_7.33 U1_7_1.1 U1_7_1.2 U1_7_1.3 U1_7_1.4 U1_7_1.5 U1_7_1.6 U1_7_1.7 U1_7_1.8 U1_7_1.9 U1_7_1.10 U1_7_1.11 U1_7_1.12 U1_7_1.13 U1_7_1.14 U1_7_1.15 U1_7_1.16 U1_7_1.17 U1_7_1.18 U1_7_1.19 U1_7_1.20 U1_7_1.21 U1_7_1.22 U1_7_1.23 U1_7_1.24 U1_7_1.25 U1_7_1.26 U1_7_1.27 U1_7_1.28 U1_7_1.29 U1_7_1.30 U1_7_1.31 U1_7_1.32 U1_7_1.33 U1_7_2.1 U1_7_2.2 U1_7_2.3 U1_7_2.4 U1_7_2.5 U1_7_2.6 U1_7_2.7 U1_7_2.8 U1_7_2.9 U1_7_2.10 U1_7_2.11 U1_7_2.12 U1_7_2.13 U1_7_2.14 U1_7_2.15 U1_7_2.16 U1_7_2.17 U1_7_2.18 U1_7_2.19 U1_7_2.20 U1_7_2.21 U1_7_2.22 U1_7_2.23 U1_7_2.24 U1_7_2.25 U1_7_2.26 U1_7_2.27 U1_7_2.28 U1_7_2.29 U1_7_2.30 U1_7_2.31 U1_7_2.32 U1_7_2.33 U1_7_3.1 U1_7_3.2 U1_7_3.3 U1_7_3.4 U1_7_3.5 U1_7_3.6 U1_7_3.7 U1_7_3.8 U1_7_3.9 U1_7_3.10 U1_7_3.11 U1_7_3.12 U1_7_3.13 U1_7_3.14 U1_7_3.15 U1_7_3.16 U1_7_3.17 U1_7_3.18 U1_7_3.19 U1_7_3.20 U1_7_3.21 U1_7_3.22 U1_7_3.23 U1_7_3.24 U1_7_3.25 U1_7_3.26 U1_7_3.27 U1_7_3.28 U1_7_3.29 U1_7_3.30 U1_7_3.31 U1_7_3.32 U1_7_3.33 U1_8.1 U1_8.2 U1_8.3 U1_8.4 U1_8.5 U1_8.6 U1_8.7 U1_8.8 U1_8.9 U1_8.10 U1_8.11 U1_8.12 U1_8.13 U1_8.14 U1_8.15 U1_8.16 U1_8.17 U1_8.18 U1_8.19 U1_8.20 U1_8.21 U1_8.22 U1_8.23 U1_8.24 U1_8.25 U1_8.26 U1_8.27 U1_8.28 U1_8.29 U1_8.30 U1_8.31 U1_8.32 U1_8.33 U1_8_1.1 U1_8_1.2 U1_8_1.3 U1_8_1.4 U1_8_1.5 U1_8_1.6 U1_8_1.7 U1_8_1.8 U1_8_1.9 U1_8_1.10 U1_8_1.11 U1_8_1.12 U1_8_1.13 U1_8_1.14 U1_8_1.15 U1_8_1.16 U1_8_1.17 U1_8_1.18 U1_8_1.19 U1_8_1.20 U1_8_1.21 U1_8_1.22 U1_8_1.23 U1_8_1.24 U1_8_1.25 U1_8_1.26 U1_8_1.27 U1_8_1.28 U1_8_1.29 U1_8_1.30 U1_8_1.31 U1_8_1.32 U1_8_1.33 U1_8_2.1 U1_8_2.2 U1_8_2.3 U1_8_2.4 U1_8_2.5 U1_8_2.6 U1_8_2.7 U1_8_2.8 U1_8_2.9 U1_8_2.10 U1_8_2.11 U1_8_2.12 U1_8_2.13 U1_8_2.14 U1_8_2.15 U1_8_2.16 U1_8_2.17 U1_8_2.18 U1_8_2.19 U1_8_2.20 U1_8_2.21 U1_8_2.22 U1_8_2.23 U1_8_2.24 U1_8_2.25 U1_8_2.26 U1_8_2.27 U1_8_2.28 U1_8_2.29 U1_8_2.30 U1_8_2.31 U1_8_2.32 U1_8_2.33 U1_8_3.1 U1_8_3.2 U1_8_3.3 U1_8_3.4 U1_8_3.5 U1_8_3.6 U1_8_3.7 U1_8_3.8 U1_8_3.9 U1_8_3.10 U1_8_3.11 U1_8_3.12 U1_8_3.13 U1_8_3.14 U1_8_3.15 U1_8_3.16 U1_8_3.17 U1_8_3.18 U1_8_3.19 U1_8_3.20 U1_8_3.21 U1_8_3.22 U1_8_3.23 U1_8_3.24 U1_8_3.25 U1_8_3.26 U1_8_3.27 U1_8_3.28 U1_8_3.29 U1_8_3.30 U1_8_3.31 U1_8_3.32 U1_8_3.33 U1_9.1 U1_9.2 U1_9.3 U1_9.4 U1_9.5 U1_9.6 U1_9.7 U1_9.8 U1_9.9 U1_9.10 U1_9.11 U1_9.12 U1_9.13 U1_9.14 U1_9.15 U1_9.16 U1_9.17 U1_9.18 U1_9.19 U1_9.20 U1_9.21 U1_9.22 U1_9.23 U1_9.24 U1_9.25 U1_9.26 U1_9.27 U1_9.28 U1_9.29 U1_9.30 U1_9.31 U1_9.32 U1_9.33 U1_9_1.1 U1_9_1.2 U1_9_1.3 U1_9_1.4 U1_9_1.5 U1_9_1.6 U1_9_1.7 U1_9_1.8 U1_9_1.9 U1_9_1.10 U1_9_1.11 U1_9_1.12 U1_9_1.13 U1_9_1.14 U1_9_1.15 U1_9_1.16 U1_9_1.17 U1_9_1.18 U1_9_1.19 U1_9_1.20 U1_9_1.21 U1_9_1.22 U1_9_1.23 U1_9_1.24 U1_9_1.25 U1_9_1.26 U1_9_1.27 U1_9_1.28 U1_9_1.29 U1_9_1.30 U1_9_1.31 U1_9_1.32 U1_9_1.33 U1_9_2.1 U1_9_2.2 U1_9_2.3 U1_9_2.4 U1_9_2.5 U1_9_2.6 U1_9_2.7 U1_9_2.8 U1_9_2.9 U1_9_2.10 U1_9_2.11 U1_9_2.12 U1_9_2.13 U1_9_2.14 U1_9_2.15 U1_9_2.16 U1_9_2.17 U1_9_2.18 U1_9_2.19 U1_9_2.20 U1_9_2.21 U1_9_2.22 U1_9_2.23 U1_9_2.24 U1_9_2.25 U1_9_2.26 U1_9_2.27 U1_9_2.28 U1_9_2.29 U1_9_2.30 U1_9_2.31 U1_9_2.32 U1_9_2.33 U1_9_3.1 U1_9_3.2 U1_9_3.3 U1_9_3.4 U1_9_3.5 U1_9_3.6 U1_9_3.7 U1_9_3.8 U1_9_3.9 U1_9_3.10 U1_9_3.11 U1_9_3.12 U1_9_3.13 U1_9_3.14 U1_9_3.15 U1_9_3.16 U1_9_3.17 U1_9_3.18 U1_9_3.19 U1_9_3.20 U1_9_3.21 U1_9_3.22 U1_9_3.23 U1_9_3.24 U1_9_3.25 U1_9_3.26 U1_9_3.27 U1_9_3.28 U1_9_3.29 U1_9_3.30 U1_9_3.31 U1_9_3.32 U1_9_3.33 U1_10.1 U1_10.2 U1_10.3 U1_10.4 U1_10.5 U1_10.6 U1_10.7 U1_10.8 U1_10.9 U1_10.10 U1_10.11 U1_10.12 U1_10.13 U1_10.14 U1_10.15 U1_10.16 U1_10.17 U1_10.18 U1_10.19 U1_10.20 U1_10.21 U1_10.22 U1_10.23 U1_10.24 U1_10.25 U1_10.26 U1_10.27 U1_10.28 U1_10.29 U1_10.30 U1_10.31 U1_10.32 U1_10.33 U1_11.1 U1_11.2 U1_11.3 U1_11.4 U1_11.5 U1_11.6 U1_11.7 U1_11.8 U1_11.9 U1_11.10 U1_11.11 U1_11.12 U1_11.13 U1_11.14 U1_11.15 U1_11.16 U1_11.17 U1_11.18 U1_11.19 U1_11.20 U1_11.21 U1_11.22 U1_11.23 U1_11.24 U1_11.25 U1_11.26 U1_11.27 U1_11.28 U1_11.29 U1_11.30 U1_11.31 U1_11.32 U1_11.33 U1_12.1 U1_12.2 U1_12.3 U1_12.4 U1_12.5 U1_12.6 U1_12.7 U1_12.8 U1_12.9 U1_12.10 U1_12.11 U1_12.12 U1_12.13 U1_12.14 U1_12.15 U1_12.16 U1_12.17 U1_12.18 U1_12.19 U1_12.20 U1_12.21 U1_12.22 U1_12.23 U1_12.24 U1_12.25 U1_12.26 U1_12.27 U1_12.28 U1_12.29 U1_12.30 U1_12.31 U1_12.32 U1_12.33 U2.1 U2.2 U2.3 U2.4 U2.5 U2_1.1 U2_1.2 U2_1.3 U2_1.4 U2_1.5 U2_1_1.1 U2_1_1.2 U2_1_1.3 U2_1_1.4 U2_1_1.5 U2_1_2.1 U2_1_2.2 U2_1_2.3 U2_1_2.4 U2_1_2.5 U2_1_3.1 U2_1_3.2 U2_1_3.3 U2_1_3.4 U2_1_3.5 U2_2.1 U2_2.2 U2_2.3 U2_2.4 U2_2.5 U2_2_1.1 U2_2_1.2 U2_2_1.3 U2_2_1.4 U2_2_1.5 U2_2_2.1 U2_2_2.2 U2_2_2.3 U2_2_2.4 U2_2_2.5 U2_2_3.1 U2_2_3.2 U2_2_3.3 U2_2_3.4 U2_2_3.5 U2_3.1 U2_3.2 U2_3.3 U2_3.4 U2_3.5 U2_3_1.1 U2_3_1.2 U2_3_1.3 U2_3_1.4 U2_3_1.5 U2_3_2.1 U2_3_2.2 U2_3_2.3 U2_3_2.4 U2_3_2.5 U2_3_3.1 U2_3_3.2 U2_3_3.3 U2_3_3.4 U2_3_3.5 U2_4.1 U2_4.2 U2_4.3 U2_4.4 U2_4.5 U2_4_1.1 U2_4_1.2 U2_4_1.3 U2_4_1.4 U2_4_1.5 U2_4_2.1 U2_4_2.2 U2_4_2.3 U2_4_2.4 U2_4_2.5 U2_4_3.1 U2_4_3.2 U2_4_3.3 U2_4_3.4 U2_4_3.5 U2_5.1 U2_5.2 U2_5.3 U2_5.4 U2_5.5 U2_5_1.1 U2_5_1.2 U2_5_1.3 U2_5_1.4 U2_5_1.5 U2_5_2.1 U2_5_2.2 U2_5_2.3 U2_5_2.4 U2_5_2.5 U2_5_3.1 U2_5_3.2 U2_5_3.3 U2_5_3.4 U2_5_3.5 U2_6.1 U2_6.2 U2_6.3 U2_6.4 U2_6.5 U2_6_1.1 U2_6_1.2 U2_6_1.3 U2_6_1.4 U2_6_1.5 U2_6_2.1 U2_6_2.2 U2_6_2.3 U2_6_2.4 U2_6_2.5 U2_6_3.1 U2_6_3.2 U2_6_3.3 U2_6_3.4 U2_6_3.5 U2_7.1 U2_7.2 U2_7.3 U2_7.4 U2_7.5 U2_7_1.1 U2_7_1.2 U2_7_1.3 U2_7_1.4 U2_7_1.5 U2_7_2.1 U2_7_2.2 U2_7_2.3 U2_7_2.4 U2_7_2.5 U2_7_3.1 U2_7_3.2 U2_7_3.3 U2_7_3.4 U2_7_3.5 U2_8.1 U2_8.2 U2_8.3 U2_8.4 U2_8.5 U2_8_1.1 U2_8_1.2 U2_8_1.3 U2_8_1.4 U2_8_1.5 U2_8_2.1 U2_8_2.2 U2_8_2.3 U2_8_2.4 U2_8_2.5 U2_8_3.1 U2_8_3.2 U2_8_3.3 U2_8_3.4 U2_8_3.5 U2_9.1 U2_9.2 U2_9.3 U2_9.4 U2_9.5 U2_9_1.1 U2_9_1.2 U2_9_1.3 U2_9_1.4 U2_9_1.5 U2_9_2.1 U2_9_2.2 U2_9_2.3 U2_9_2.4 U2_9_2.5 U2_9_3.1 U2_9_3.2 U2_9_3.3 U2_9_3.4 U2_9_3.5 U2_10.1 U2_10.2 U2_10.3 U2_10.4 U2_10.5 U2_11.1 U2_11.2 U2_11.3 U2_11.4 U2_11.5 U2_12.1 U2_12.2 U2_12.3 U2_12.4 U2_12.5
copper on no net: | length 9609.1